# EAGLE board ARRAY_Nano-CC-EL_0v6.2_ENP252-17 (EAGLE 7.3.0), part 1 of 2
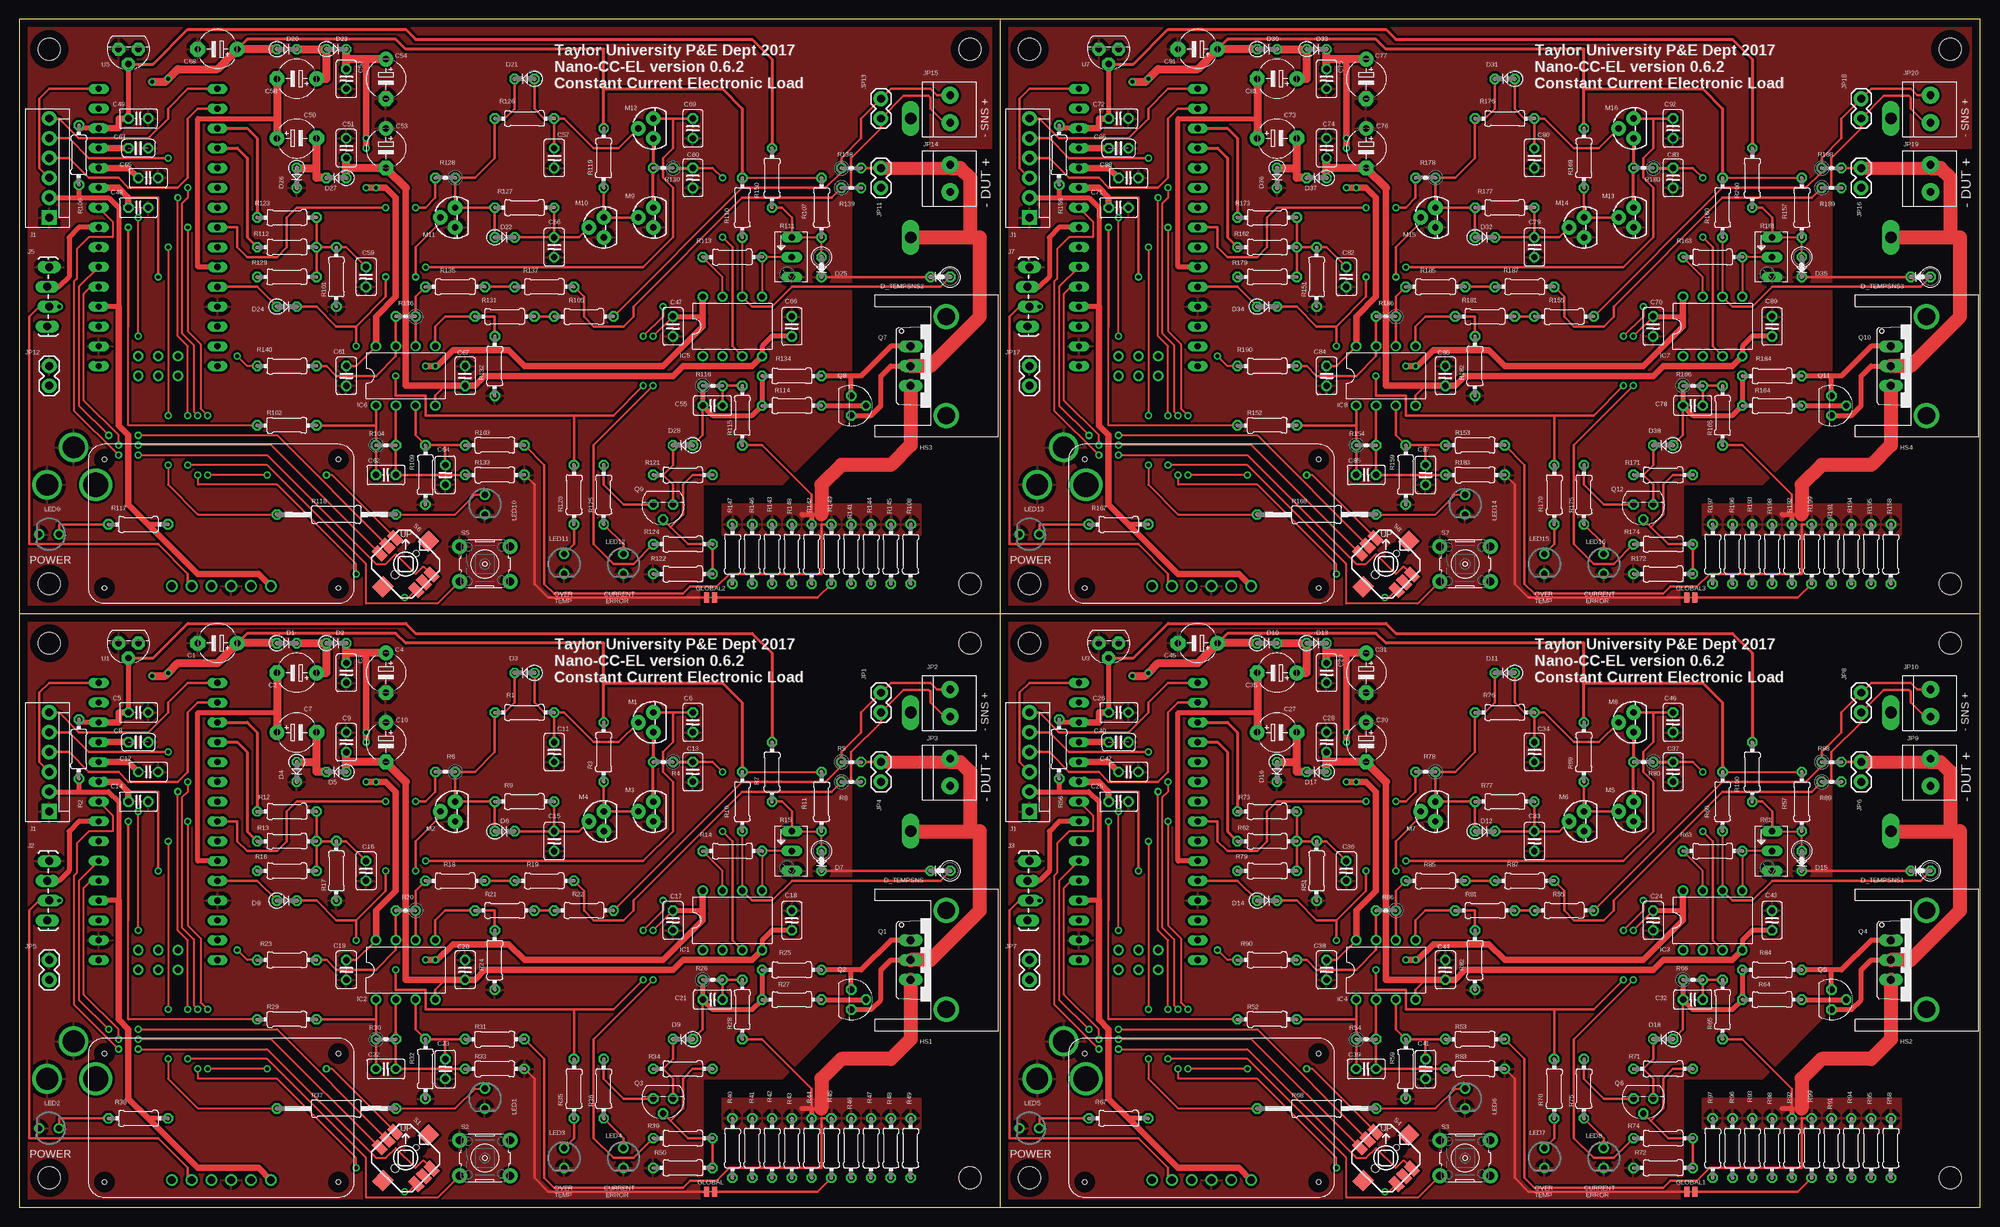
[diagram p0: board, top side]
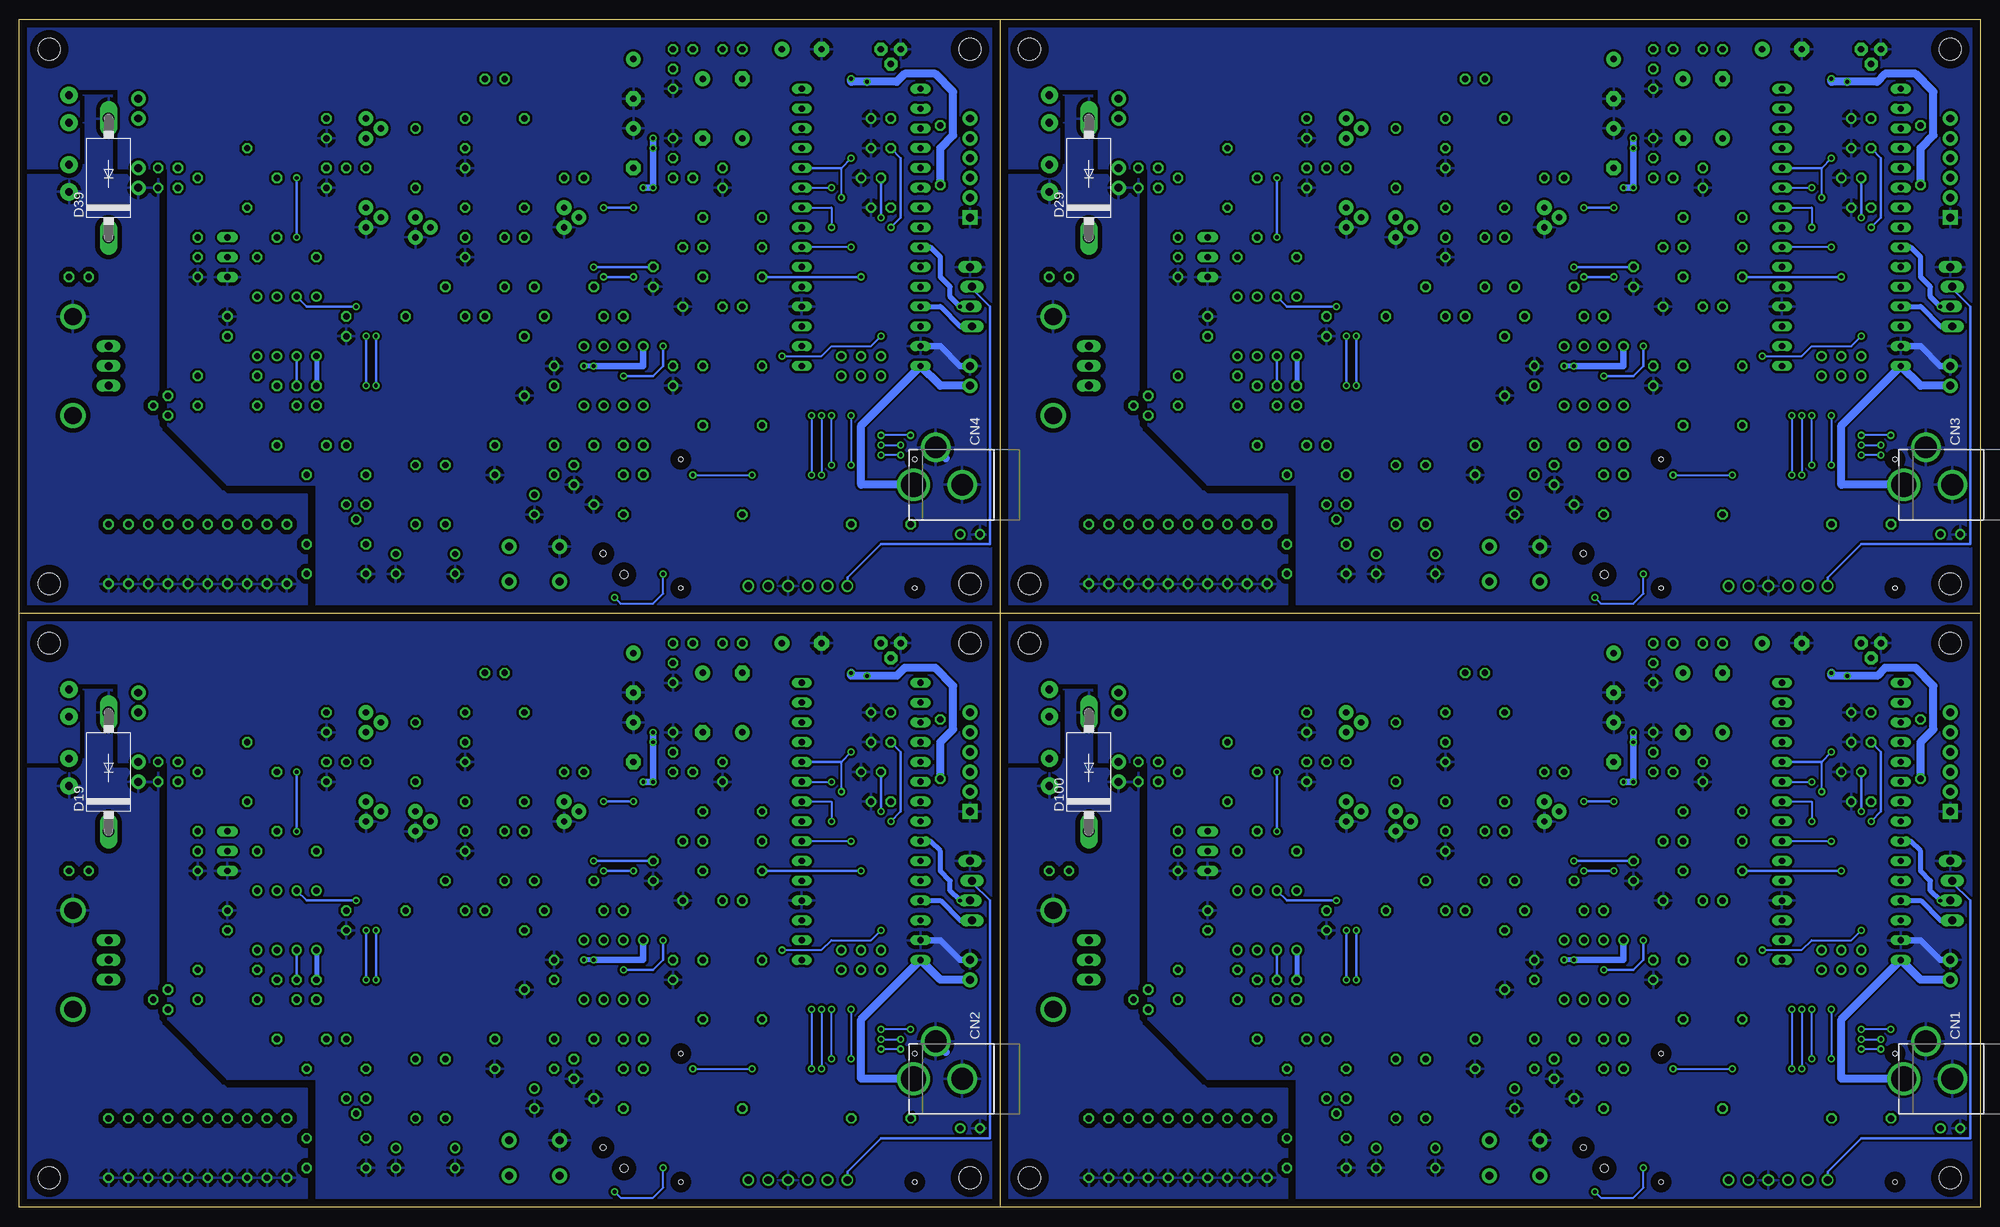
[diagram p1: board, bottom side, seen from below]

Size 251.46 x 152.4 mm. Coordinates in mm from the lower left corner, seen from the top.
Outline: 125.73,0 0,0 0,76.2
Outline: 125.73,0 251.46,0 251.46,76.2
Outline: 125.73,76.2 125.73,0
Outline: 0,76.2 125.73,76.2
Outline: 125.73,152.4 0,152.4 0,76.2
Outline: 125.73,76.2 251.46,76.2
Outline: 251.46,76.2 251.46,152.4 125.73,152.4
Outline: 125.73,152.4 125.73,76.2
Copper layers (1*16): Top 0.035mm / dielectric 1.5mm / Bottom 0.035mm
Design rules "4pcb_$33": minimum track width 6mil, minimum drill 15mil, track to track 6mil, track to pad 6mil, pad to pad 6mil, via to via 6mil, smd to smd 6mil, copper to edge 40mil, drill to drill 6mil, minimum pad ring 10mil, minimum via ring 8mil, stop-mask expansion 4mil, vias tented up to drill 0mil, thermal gap 20mil
Holes 2.79 mm at 3.81,3.81 3.81,72.39 121.92,3.81 121.92,72.39 129.54,3.81 129.54,72.39 247.65,3.81 247.65,72.39 3.81,80.01 3.81,148.59 121.92,80.01 121.92,148.59 129.54,80.01 129.54,148.59 247.65,80.01 247.65,148.59

## Footprints (pad centres in the part's own frame; a part is rotated, then mirrored left to right if it is on the bottom)
E5-5 = drill 0.813 pad 1.905: + -2.54,0 | drill 0.813 pad 1.905 octagon: - 2.54,0
C025-025X050 = drill 0.813 octagon: 1 -1.27,0; 2 1.27,0
C025-024X044 = drill 0.813 octagon: 1 -1.27,0; 2 1.27,0
DCJACK_2MM_PTH = drill 2.8: GND 0,7.35; GNDBREAK 4.8,10.75 | drill 3.2: PWR 0,13.6
0207/2V-D = drill 0.813 octagon: A -1.27,0; K 1.27,0
DO201-15 = drill 1.499 long: A 7.62,0; C -7.62,0
PAD-JUMPER-2-NC_BY_TRACE_NO_SILK = smd 0.635 x 1.27: 1 -0.508,0; 2 0.508,0
WX-T220-101E = drill 2.2 pad 3.175: K1 -6.35,-4.572; K2 6.35,-4.572
DIL08 = drill 0.813 pad 1.27: 1 -3.81,-3.81; 2 -1.27,-3.81; 3 1.27,-3.81; 4 3.81,-3.81; 5 3.81,3.81; 6 1.27,3.81; 7 -1.27,3.81; 8 -3.81,3.81
MOLEX-1X6 = drill 1.016 pad 1.88 square: 1 0,0 | drill 1.016 pad 1.88: 2 2.54,0; 3 5.08,0; 4 7.62,0; 5 10.16,0; 6 12.7,0
1X04_LOCK_LONGPADS = drill 1.016 long: 1 0,0; 2 2.54,-0.254; 3 5.08,0; 4 7.62,-0.254
1X02 = drill 1.016 pad 1.88: 1 0,0; 2 2.54,0
1X2-3.5MM = drill 1 pad 2.184: 1 1.8,0; 2 -1.7,0
LED3MM-NS = drill 0.813: A -1.27,0; K 1.27,0
TO-92 = drill 0.813 pad 1.88: 1 -1.27,0; 2 0,1.905; 3 1.27,0
TO220AV = drill 1.016 long: B -2.54,-2.54; C 0,-2.54; E 2.54,-2.54
TO92 = drill 0.813 octagon: 1 1.27,0; 2 0,1.905; 3 -1.27,0
0204/7 = drill 0.813 octagon: 1 -3.81,0; 2 3.81,0
0204V = drill 0.813 octagon: 1 -1.27,0; 2 1.27,0
B64Y = drill 0.813 long: A 2.54,0; E -2.54,0; S 0,0
0207/15 = drill 0.813 octagon: 1 -7.62,0; 2 7.62,0
JOYSTICK_MINI = smd 1.85 x 1.1: A -3.325,1.4; B 3.325,1.4; C -3.325,-1.4; CTR -3.325,0; D 3.325,-1.4; GND 3.325,0 | smd 1.9 x 2: NC 0,4.13; NC@0 0,-4.13 | hole 0.75: 0,1.9 | hole 1.05: 0,-1.9
OMRON_B3F-1XX-JPGMOD = drill 1.016 pad 1.93: 1 -3.251,-2.261; 2 3.251,-2.261; 3 -3.251,2.261; 4 3.251,2.261
TO92' = drill 0.813 pad 1.676 octagon: 1 -1.27,0; 2 0,1.905; 3 1.27,0
ADAFRUIT_128X32_I2C_OLED = drill 1: 3.3V 20.81,2.254; GND 18.27,2.254; RST 15.73,2.254; SCL 13.19,2.254; SDA 10.65,2.254; VIN 23.35,2.254 | hole 0.6: 2,2; 2,18.5; 32,18.5; 32,2
NANO = drill 0.8 long: 3.3V -10.16,24.13; 5V -10.16,-1.27; A0 -10.16,19.05; A1 -10.16,16.51; A2 -10.16,13.97; A3 -10.16,11.43; A4 -10.16,8.89; A5 -10.16,6.35; A6 -10.16,3.81; A7 -10.16,1.27; AREF -10.16,21.59; D2 5.08,1.27; D3 5.08,3.81; D4 5.08,6.35; D5 5.08,8.89; D6 5.08,11.43; D7 5.08,13.97; D8 5.08,16.51; D9 5.08,19.05; D10 5.08,21.59; D11 5.08,24.13; D12 5.08,26.67; D13 -10.16,26.67; GND -10.16,-6.35; GND1 5.08,-1.27; RAW -10.16,-8.89; RST -10.16,-3.81; RST1 5.08,-3.81; RX1 5.08,-6.35; TX0 5.08,-8.89 | drill 0.8: ICSP1 -5.08,-10.16; ICSP2 -5.08,-7.62; ICSP3 -2.54,-10.16; ICSP4 -2.54,-7.62; ICSP5 0,-10.16; ICSP6 0,-7.62

## Placement (x,y rotation side)
C1  10uF  [E5-5]  25.4,72.39 180 top
C2  10uF  [E5-5]  35.56,68.58 180 top
C3  0.1uF  [C025-025X050]  41.91,68.58 270 top
C4  10uF  [E5-5]  46.99,68.58 270 top
C5  0.1u  [C025-025X050]  15.24,63.5 0 top
C6  0.1uF  [C025-025X050]  86.36,62.23 270 top
C7  10uF  [E5-5]  35.56,60.96 0 top
C8  100nF  [C025-024X044]  15.24,59.69 0 top
C9  0.1uF  [C025-025X050]  41.91,59.69 270 top
C10  10uF  [E5-5]  46.99,59.69 270 top
C11  1nF  [C025-025X050]  68.58,58.42 270 top
C12  0.1uF  [C025-025X050]  16.51,55.88 0 top
C13  TBD  [C025-025X050]  86.36,55.88 270 top
C14  TBD  [C025-025X050]  15.24,52.07 0 top
C15  1nF  [C025-025X050]  68.58,46.99 270 top
C16  TBD  [C025-025X050]  44.45,43.18 270 top
C17  0.1uF  [C025-025X050]  83.82,36.83 270 top
C18  0.1uF  [C025-025X050]  99.06,36.83 270 top
C19  0.1uF  [C025-025X050]  41.91,30.48 270 top
C20  0.1uF  [C025-025X050]  57.15,30.48 270 top
C21  TBD  [C025-025X050]  88.9,26.67 180 top
C22  0.1uF  [C025-025X050]  46.99,17.78 0 top
C23  0.1uF  [C025-025X050]  54.61,17.78 90 top
C24  0.1uF  [C025-025X050]  209.55,36.83 270 top
C25  TBD  [C025-025X050]  140.97,52.07 0 top
C26  0.1u  [C025-025X050]  140.97,63.5 0 top
C27  10uF  [E5-5]  161.29,60.96 0 top
C28  0.1uF  [C025-025X050]  167.64,59.69 270 top
C29  0.1uF  [C025-025X050]  167.64,68.58 270 top
C30  10uF  [E5-5]  172.72,59.69 270 top
C31  10uF  [E5-5]  172.72,68.58 270 top
C32  TBD  [C025-025X050]  214.63,26.67 180 top
C33  1nF  [C025-025X050]  194.31,46.99 270 top
C34  1nF  [C025-025X050]  194.31,58.42 270 top
C35  10uF  [E5-5]  161.29,68.58 180 top
C36  TBD  [C025-025X050]  170.18,43.18 270 top
C37  TBD  [C025-025X050]  212.09,55.88 270 top
C38  0.1uF  [C025-025X050]  167.64,30.48 270 top
C39  0.1uF  [C025-025X050]  172.72,17.78 0 top
C40  100nF  [C025-024X044]  140.97,59.69 0 top
C41  0.1uF  [C025-025X050]  180.34,17.78 90 top
C42  0.1uF  [C025-025X050]  142.24,55.88 0 top
C43  0.1uF  [C025-025X050]  224.79,36.83 270 top
C44  0.1uF  [C025-025X050]  182.88,30.48 270 top
C45  10uF  [E5-5]  151.13,72.39 180 top
C46  0.1uF  [C025-025X050]  212.09,62.23 270 top
C47  0.1uF  [C025-025X050]  83.82,113.03 270 top
C48  TBD  [C025-025X050]  15.24,128.27 0 top
C49  0.1u  [C025-025X050]  15.24,139.7 0 top
C50  10uF  [E5-5]  35.56,137.16 0 top
C51  0.1uF  [C025-025X050]  41.91,135.89 270 top
C52  0.1uF  [C025-025X050]  41.91,144.78 270 top
C53  10uF  [E5-5]  46.99,135.89 270 top
C54  10uF  [E5-5]  46.99,144.78 270 top
C55  TBD  [C025-025X050]  88.9,102.87 180 top
C56  1nF  [C025-025X050]  68.58,123.19 270 top
C57  1nF  [C025-025X050]  68.58,134.62 270 top
C58  10uF  [E5-5]  35.56,144.78 180 top
C59  TBD  [C025-025X050]  44.45,119.38 270 top
C60  TBD  [C025-025X050]  86.36,132.08 270 top
C61  0.1uF  [C025-025X050]  41.91,106.68 270 top
C62  0.1uF  [C025-025X050]  46.99,93.98 0 top
C63  100nF  [C025-024X044]  15.24,135.89 0 top
C64  0.1uF  [C025-025X050]  54.61,93.98 90 top
C65  0.1uF  [C025-025X050]  16.51,132.08 0 top
C66  0.1uF  [C025-025X050]  99.06,113.03 270 top
C67  0.1uF  [C025-025X050]  57.15,106.68 270 top
C68  10uF  [E5-5]  25.4,148.59 180 top
C69  0.1uF  [C025-025X050]  86.36,138.43 270 top
C70  0.1uF  [C025-025X050]  209.55,113.03 270 top
C71  TBD  [C025-025X050]  140.97,128.27 0 top
C72  0.1u  [C025-025X050]  140.97,139.7 0 top
C73  10uF  [E5-5]  161.29,137.16 0 top
C74  0.1uF  [C025-025X050]  167.64,135.89 270 top
C75  0.1uF  [C025-025X050]  167.64,144.78 270 top
C76  10uF  [E5-5]  172.72,135.89 270 top
C77  10uF  [E5-5]  172.72,144.78 270 top
C78  TBD  [C025-025X050]  214.63,102.87 180 top
C79  1nF  [C025-025X050]  194.31,123.19 270 top
C80  1nF  [C025-025X050]  194.31,134.62 270 top
C81  10uF  [E5-5]  161.29,144.78 180 top
C82  TBD  [C025-025X050]  170.18,119.38 270 top
C83  TBD  [C025-025X050]  212.09,132.08 270 top
C84  0.1uF  [C025-025X050]  167.64,106.68 270 top
C85  0.1uF  [C025-025X050]  172.72,93.98 0 top
C86  100nF  [C025-024X044]  140.97,135.89 0 top
C87  0.1uF  [C025-025X050]  180.34,93.98 90 top
C88  0.1uF  [C025-025X050]  142.24,132.08 0 top
C89  0.1uF  [C025-025X050]  224.79,113.03 270 top
C90  0.1uF  [C025-025X050]  182.88,106.68 270 top
C91  10uF  [E5-5]  151.13,148.59 180 top
C92  0.1uF  [C025-025X050]  212.09,138.43 270 top
CN1  [DCJACK_2MM_PTH]  -3.81,16.51 90 bottom
CN2  [DCJACK_2MM_PTH]  123.19,16.51 90 bottom
CN3  [DCJACK_2MM_PTH]  -3.81,92.71 90 bottom
CN4  [DCJACK_2MM_PTH]  123.19,92.71 90 bottom
D1  1N4148  [0207/2V-D]  34.29,72.39 0 top
D2  1N4148  [0207/2V-D]  40.64,72.39 0 top
D3  1N4148  [0207/2V-D]  64.77,68.58 180 top
D4  1N4148  [0207/2V-D]  35.56,55.88 270 top
D5  1N4148  [0207/2V-D]  40.64,55.88 180 top
D6  1N4148  [0207/2V-D]  62.23,48.26 0 top
D7  1N4148  [0207/2V-D]  102.87,44.45 270 top
D8  1N4148  [0207/2V-D]  34.29,39.37 0 top
D9  1N4148  [0207/2V-D]  85.09,21.59 180 top
D10  1N4148  [0207/2V-D]  160.02,72.39 0 top
D11  1N4148  [0207/2V-D]  190.5,68.58 180 top
D12  1N4148  [0207/2V-D]  187.96,48.26 0 top
D13  1N4148  [0207/2V-D]  166.37,72.39 0 top
D14  1N4148  [0207/2V-D]  160.02,39.37 0 top
D15  1N4148  [0207/2V-D]  228.6,44.45 270 top
D16  1N4148  [0207/2V-D]  161.29,55.88 270 top
D17  1N4148  [0207/2V-D]  166.37,55.88 180 top
D18  1N4148  [0207/2V-D]  210.82,21.59 180 top
D19  1N5400  [DO201-15]  240.03,55.88 90 bottom
D20  1N4148  [0207/2V-D]  34.29,148.59 0 top
D21  1N4148  [0207/2V-D]  64.77,144.78 180 top
D22  1N4148  [0207/2V-D]  62.23,124.46 0 top
D23  1N4148  [0207/2V-D]  40.64,148.59 0 top
D24  1N4148  [0207/2V-D]  34.29,115.57 0 top
D25  1N4148  [0207/2V-D]  102.87,120.65 270 top
D26  1N4148  [0207/2V-D]  35.56,132.08 270 top
D27  1N4148  [0207/2V-D]  40.64,132.08 180 top
D28  1N4148  [0207/2V-D]  85.09,97.79 180 top
D29  1N5400  [DO201-15]  114.3,132.08 90 bottom
D30  1N4148  [0207/2V-D]  160.02,148.59 0 top
D31  1N4148  [0207/2V-D]  190.5,144.78 180 top
D32  1N4148  [0207/2V-D]  187.96,124.46 0 top
D33  1N4148  [0207/2V-D]  166.37,148.59 0 top
D34  1N4148  [0207/2V-D]  160.02,115.57 0 top
D35  1N4148  [0207/2V-D]  228.6,120.65 270 top
D36  1N4148  [0207/2V-D]  161.29,132.08 270 top
D37  1N4148  [0207/2V-D]  166.37,132.08 180 top
D38  1N4148  [0207/2V-D]  210.82,97.79 180 top
D39  1N5400  [DO201-15]  240.03,132.08 90 bottom
D100  1N5400  [DO201-15]  114.3,55.88 90 bottom
D_TEMPSNS  1N4148  [0207/2V-D]  118.11,43.18 180 top
D_TEMPSNS1  1N4148  [0207/2V-D]  243.84,43.18 180 top
D_TEMPSNS2  1N4148  [0207/2V-D]  118.11,119.38 180 top
D_TEMPSNS3  1N4148  [0207/2V-D]  243.84,119.38 180 top
GLOBAL  [PAD-JUMPER-2-NC_BY_TRACE_NO_SILK]  88.65,2.03 0 top
GLOBAL1  [PAD-JUMPER-2-NC_BY_TRACE_NO_SILK]  214.38,2.03 0 top
GLOBAL2  [PAD-JUMPER-2-NC_BY_TRACE_NO_SILK]  88.65,78.23 0 top
GLOBAL3  [PAD-JUMPER-2-NC_BY_TRACE_NO_SILK]  214.38,78.23 0 top
HS1  WA-T220-101E  [WX-T220-101E]  114.3,31.75 90 top
HS2  WA-T220-101E  [WX-T220-101E]  240.03,31.75 90 top
HS3  WA-T220-101E  [WX-T220-101E]  114.3,107.95 90 top
HS4  WA-T220-101E  [WX-T220-101E]  240.03,107.95 90 top
IC1  LM358N  [DIL08]  91.44,36.83 0 top
IC2  LM358N  [DIL08]  49.53,30.48 0 top
IC3  LM358N  [DIL08]  217.17,36.83 0 top
IC4  LM358N  [DIL08]  175.26,30.48 0 top
IC5  LM358N  [DIL08]  91.44,113.03 0 top
IC6  LM358N  [DIL08]  49.53,106.68 0 top
IC7  LM358N  [DIL08]  217.17,113.03 0 top
IC8  LM358N  [DIL08]  175.26,106.68 0 top
J1  [MOLEX-1X6]  3.81,50.8 90 top
J2  [1X04_LOCK_LONGPADS]  3.81,44.45 270 top
J3  [1X04_LOCK_LONGPADS]  129.54,44.45 270 top
J4  [MOLEX-1X6]  129.54,50.8 90 top
J5  [1X04_LOCK_LONGPADS]  3.81,120.65 270 top
J6  [MOLEX-1X6]  3.81,127 90 top
J7  [1X04_LOCK_LONGPADS]  129.54,120.65 270 top
J8  [MOLEX-1X6]  129.54,127 90 top
JP1  [1X02]  110.49,66.04 270 top
JP2  1X2-3.5MM  [1X2-3.5MM]  119.38,64.77 270 top
JP3  1X2-3.5MM  [1X2-3.5MM]  119.38,55.88 270 top
JP4  [1X02]  110.49,54.61 90 top
JP5  [1X02]  3.81,31.75 270 top
JP6  [1X02]  236.22,54.61 90 top
JP7  [1X02]  129.54,31.75 270 top
JP8  [1X02]  236.22,66.04 270 top
JP9  1X2-3.5MM  [1X2-3.5MM]  245.11,55.88 270 top
JP10  1X2-3.5MM  [1X2-3.5MM]  245.11,64.77 270 top
JP11  [1X02]  110.49,130.81 90 top
JP12  [1X02]  3.81,107.95 270 top
JP13  [1X02]  110.49,142.24 270 top
JP14  1X2-3.5MM  [1X2-3.5MM]  119.38,132.08 270 top
JP15  1X2-3.5MM  [1X2-3.5MM]  119.38,140.97 270 top
JP16  [1X02]  236.22,130.81 90 top
JP17  [1X02]  129.54,107.95 270 top
JP18  [1X02]  236.22,142.24 270 top
JP19  1X2-3.5MM  [1X2-3.5MM]  245.11,132.08 270 top
JP20  1X2-3.5MM  [1X2-3.5MM]  245.11,140.97 270 top
LED1  [LED3MM-NS]  59.69,13.97 270 top
LED2  [LED3MM-NS]  3.81,10.16 180 top
LED3  [LED3MM-NS]  69.85,6.35 270 top
LED4  [LED3MM-NS]  77.47,6.35 270 top
LED5  [LED3MM-NS]  129.54,10.16 180 top
LED6  [LED3MM-NS]  185.42,13.97 270 top
LED7  [LED3MM-NS]  195.58,6.35 270 top
LED8  [LED3MM-NS]  203.2,6.35 270 top
LED9  [LED3MM-NS]  3.81,86.36 180 top
LED10  [LED3MM-NS]  59.69,90.17 270 top
LED11  [LED3MM-NS]  69.85,82.55 270 top
LED12  [LED3MM-NS]  77.47,82.55 270 top
LED13  [LED3MM-NS]  129.54,86.36 180 top
LED14  [LED3MM-NS]  185.42,90.17 270 top
LED15  [LED3MM-NS]  195.58,82.55 270 top
LED16  [LED3MM-NS]  203.2,82.55 270 top
M1  2N7000  [TO-92]  81.28,62.23 90 top
M2  2N7000  [TO-92]  55.88,50.8 90 top
M3  2N7000  [TO-92]  81.28,50.8 90 top
M4  2N7000  [TO-92]  74.93,49.53 90 top
M5  2N7000  [TO-92]  207.01,50.8 90 top
M6  2N7000  [TO-92]  200.66,49.53 90 top
M7  2N7000  [TO-92]  181.61,50.8 90 top
M8  2N7000  [TO-92]  207.01,62.23 90 top
M9  2N7000  [TO-92]  81.28,127 90 top
M10  2N7000  [TO-92]  74.93,125.73 90 top
M11  2N7000  [TO-92]  55.88,127 90 top
M12  2N7000  [TO-92]  81.28,138.43 90 top
M13  2N7000  [TO-92]  207.01,127 90 top
M14  2N7000  [TO-92]  200.66,125.73 90 top
M15  2N7000  [TO-92]  181.61,127 90 top
M16  2N7000  [TO-92]  207.01,138.43 90 top
Q1  MJE3055  [TO220AV]  116.84,31.75 270 top
Q2  2N3904  [TO92]  106.68,26.67 270 top
Q3  2N3906  [TO92]  82.55,13.97 180 top
Q4  MJE3055  [TO220AV]  242.57,31.75 270 top
Q5  2N3904  [TO92]  232.41,26.67 270 top
Q6  2N3906  [TO92]  208.28,13.97 180 top
Q7  MJE3055  [TO220AV]  116.84,107.95 270 top
Q8  2N3904  [TO92]  106.68,102.87 270 top
Q9  2N3906  [TO92]  82.55,90.17 180 top
Q10  MJE3055  [TO220AV]  242.57,107.95 270 top
Q11  2N3904  [TO92]  232.41,102.87 270 top
Q12  2N3906  [TO92]  208.28,90.17 180 top
R1  10k  [0204/7]  64.77,63.5 180 top
R2  20k  [0204/7]  7.62,58.8 90 top
R3  10k  [0204/7]  74.93,58.42 90 top
R4  TBD  [0204V]  82.55,57.15 180 top
R5  10  [0204V]  106.68,57.15 0 top
R6  1k  [0204V]  54.61,55.88 180 top
R7  10k  [0204/7]  96.52,55.88 270 top
R8  10  [0204V]  106.68,54.61 0 top
R9  10k  [0204/7]  64.77,52.07 180 top
R10  10k  [0204/7]  92.71,52.07 270 top
R11  10k  [0204/7]  102.87,52.07 270 top
R12  TBD  [0204/7]  34.29,50.8 180 top
R13  TBD  [0204/7]  34.29,46.99 180 top
R14  TBD  [0204/7]  91.44,45.72 180 top
R15  10-50k  [B64Y]  99.06,45.72 270 top
R16  TBD  [0204/7]  34.29,43.18 180 top
R17  TBD  [0204/7]  40.64,43.18 90 top
R18  100k  [0204/7]  55.88,41.91 180 top
R19  100k  [0204/7]  67.31,41.91 180 top
R20  49.9k  [0204V]  49.53,38.1 180 top
R21  100k  [0204/7]  62.23,38.1 180 top
R22  100k  [0204/7]  72.39,38.1 180 top
R23  10k  [0204/7]  34.29,31.75 180 top
R24  49.9k  [0204/7]  60.96,31.75 270 top
R25  1k  [0204/7]  99.06,30.48 180 top
R26  TBD  [0204V]  88.9,29.21 0 top
R27  1k  [0204/7]  99.06,26.67 180 top
R28  TBD  [0204/7]  92.71,25.4 90 top
R29  10k  [0204/7]  34.29,24.13 0 top
R30  10.0k  [0204V]  46.99,21.59 0 top
R31  1.0k  [0204/7]  60.96,21.59 0 top
R32  10.0k  [0204/7]  52.07,17.78 90 top
R33  1.0k  [0204/7]  60.96,17.78 0 top
R34  10.0k  [0204/7]  85.09,17.78 180 top
R35  680  [0204/7]  71.12,15.24 270 top
R36  680  [0204/7]  74.93,15.24 270 top
R37  680  [0207/15]  40.64,12.7 0 top
R38  680  [0204/7]  15.24,11.43 180 top
R39  20.0k  [0204/7]  85.09,8.89 180 top
R40  100m  [0204/7]  91.44,7.62 270 top
R41  100m  [0204/7]  93.98,7.62 270 top
R42  100m  [0204/7]  96.52,7.62 270 top
R43  100m  [0204/7]  99.06,7.62 270 top
R44  100m  [0204/7]  101.6,7.62 270 top
R45  100m  [0204/7]  104.14,7.62 270 top
R46  100m  [0204/7]  106.68,7.62 270 top
R47  100m  [0204/7]  109.22,7.62 270 top
R48  100m  [0204/7]  111.76,7.62 270 top
R49  100m  [0204/7]  114.3,7.62 270 top
R50  10.0k  [0204/7]  85.09,5.08 180 top
R51  TBD  [0204/7]  166.37,43.18 90 top
R52  10k  [0204/7]  160.02,24.13 0 top
R53  1.0k  [0204/7]  186.69,21.59 0 top
R54  10.0k  [0204V]  172.72,21.59 0 top
R55  100k  [0204/7]  198.12,38.1 180 top
R56  20k  [0204/7]  133.35,58.8 90 top
R57  10k  [0204/7]  228.6,52.07 270 top
R58  100m  [0204/7]  240.03,7.62 270 top
R59  10.0k  [0204/7]  177.8,17.78 90 top
R60  10k  [0204/7]  218.44,52.07 270 top
R61  10-50k  [B64Y]  224.79,45.72 270 top
R62  TBD  [0204/7]  160.02,46.99 180 top
R63  TBD  [0204/7]  217.17,45.72 180 top
R64  1k  [0204/7]  224.79,26.67 180 top
R65  TBD  [0204/7]  218.44,25.4 90 top
R66  TBD  [0204V]  214.63,29.21 0 top
R67  680  [0204/7]  140.97,11.43 180 top
R68  680  [0207/15]  166.37,12.7 0 top
R69  10k  [0204/7]  200.66,58.42 90 top
R70  680  [0204/7]  196.85,15.24 270 top
R71  10.0k  [0204/7]  210.82,17.78 180 top
R72  10.0k  [0204/7]  210.82,5.08 180 top
R73  TBD  [0204/7]  160.02,50.8 180 top
R74  20.0k  [0204/7]  210.82,8.89 180 top
R75  680  [0204/7]  200.66,15.24 270 top
R76  10k  [0204/7]  190.5,63.5 180 top
R77  10k  [0204/7]  190.5,52.07 180 top
R78  1k  [0204V]  180.34,55.88 180 top
R79  TBD  [0204/7]  160.02,43.18 180 top
R80  TBD  [0204V]  208.28,57.15 180 top
R81  100k  [0204/7]  187.96,38.1 180 top
R82  49.9k  [0204/7]  186.69,31.75 270 top
R83  1.0k  [0204/7]  186.69,17.78 0 top
R84  1k  [0204/7]  224.79,30.48 180 top
R85  100k  [0204/7]  181.61,41.91 180 top
R86  49.9k  [0204V]  175.26,38.1 180 top
R87  100k  [0204/7]  193.04,41.91 180 top
R88  10  [0204V]  232.41,57.15 0 top
R89  10  [0204V]  232.41,54.61 0 top
R90  10k  [0204/7]  160.02,31.75 180 top
R91  100m  [0204/7]  232.41,7.62 270 top
R92  100m  [0204/7]  227.33,7.62 270 top
R93  100m  [0204/7]  222.25,7.62 270 top
R94  100m  [0204/7]  234.95,7.62 270 top
R95  100m  [0204/7]  237.49,7.62 270 top
R96  100m  [0204/7]  219.71,7.62 270 top
R97  100m  [0204/7]  217.17,7.62 270 top
R98  100m  [0204/7]  224.79,7.62 270 top
R99  100m  [0204/7]  229.87,7.62 270 top
R100  10k  [0204/7]  222.25,55.88 270 top
R101  TBD  [0204/7]  40.64,119.38 90 top
R102  10k  [0204/7]  34.29,100.33 0 top
R103  1.0k  [0204/7]  60.96,97.79 0 top
R104  10.0k  [0204V]  46.99,97.79 0 top
R105  100k  [0204/7]  72.39,114.3 180 top
R106  20k  [0204/7]  7.62,135 90 top
R107  10k  [0204/7]  102.87,128.27 270 top
R108  100m  [0204/7]  114.3,83.82 270 top
R109  10.0k  [0204/7]  52.07,93.98 90 top
R110  10k  [0204/7]  92.71,128.27 270 top
R111  10-50k  [B64Y]  99.06,121.92 270 top
R112  TBD  [0204/7]  34.29,123.19 180 top
R113  TBD  [0204/7]  91.44,121.92 180 top
R114  1k  [0204/7]  99.06,102.87 180 top
R115  TBD  [0204/7]  92.71,101.6 90 top
R116  TBD  [0204V]  88.9,105.41 0 top
R117  680  [0204/7]  15.24,87.63 180 top
R118  680  [0207/15]  40.64,88.9 0 top
R119  10k  [0204/7]  74.93,134.62 90 top
R120  680  [0204/7]  71.12,91.44 270 top
R121  10.0k  [0204/7]  85.09,93.98 180 top
R122  10.0k  [0204/7]  85.09,81.28 180 top
R123  TBD  [0204/7]  34.29,127 180 top
R124  20.0k  [0204/7]  85.09,85.09 180 top
R125  680  [0204/7]  74.93,91.44 270 top
R126  10k  [0204/7]  64.77,139.7 180 top
R127  10k  [0204/7]  64.77,128.27 180 top
R128  1k  [0204V]  54.61,132.08 180 top
R129  TBD  [0204/7]  34.29,119.38 180 top
R130  TBD  [0204V]  82.55,133.35 180 top
R131  100k  [0204/7]  62.23,114.3 180 top
R132  49.9k  [0204/7]  60.96,107.95 270 top
R133  1.0k  [0204/7]  60.96,93.98 0 top
R134  1k  [0204/7]  99.06,106.68 180 top
R135  100k  [0204/7]  55.88,118.11 180 top
R136  49.9k  [0204V]  49.53,114.3 180 top
R137  100k  [0204/7]  67.31,118.11 180 top
R138  10  [0204V]  106.68,133.35 0 top
R139  10  [0204V]  106.68,130.81 0 top
R140  10k  [0204/7]  34.29,107.95 180 top
R141  100m  [0204/7]  106.68,83.82 270 top
R142  100m  [0204/7]  101.6,83.82 270 top
R143  100m  [0204/7]  96.52,83.82 270 top
R144  100m  [0204/7]  109.22,83.82 270 top
R145  100m  [0204/7]  111.76,83.82 270 top
R146  100m  [0204/7]  93.98,83.82 270 top
R147  100m  [0204/7]  91.44,83.82 270 top
R148  100m  [0204/7]  99.06,83.82 270 top
R149  100m  [0204/7]  104.14,83.82 270 top
R150  10k  [0204/7]  96.52,132.08 270 top
R151  TBD  [0204/7]  166.37,119.38 90 top
R152  10k  [0204/7]  160.02,100.33 0 top
R153  1.0k  [0204/7]  186.69,97.79 0 top
R154  10.0k  [0204V]  172.72,97.79 0 top
R155  100k  [0204/7]  198.12,114.3 180 top
R156  20k  [0204/7]  133.35,135 90 top
R157  10k  [0204/7]  228.6,128.27 270 top
R158  100m  [0204/7]  240.03,83.82 270 top
R159  10.0k  [0204/7]  177.8,93.98 90 top
R160  10k  [0204/7]  218.44,128.27 270 top
R161  10-50k  [B64Y]  224.79,121.92 270 top
R162  TBD  [0204/7]  160.02,123.19 180 top
R163  TBD  [0204/7]  217.17,121.92 180 top
R164  1k  [0204/7]  224.79,102.87 180 top
R165  TBD  [0204/7]  218.44,101.6 90 top
R166  TBD  [0204V]  214.63,105.41 0 top
R167  680  [0204/7]  140.97,87.63 180 top
R168  680  [0207/15]  166.37,88.9 0 top
R169  10k  [0204/7]  200.66,134.62 90 top
R170  680  [0204/7]  196.85,91.44 270 top
R171  10.0k  [0204/7]  210.82,93.98 180 top
R172  10.0k  [0204/7]  210.82,81.28 180 top
R173  TBD  [0204/7]  160.02,127 180 top
R174  20.0k  [0204/7]  210.82,85.09 180 top
R175  680  [0204/7]  200.66,91.44 270 top
R176  10k  [0204/7]  190.5,139.7 180 top
R177  10k  [0204/7]  190.5,128.27 180 top
R178  1k  [0204V]  180.34,132.08 180 top
R179  TBD  [0204/7]  160.02,119.38 180 top
R180  TBD  [0204V]  208.28,133.35 180 top
R181  100k  [0204/7]  187.96,114.3 180 top
R182  49.9k  [0204/7]  186.69,107.95 270 top
R183  1.0k  [0204/7]  186.69,93.98 0 top
R184  1k  [0204/7]  224.79,106.68 180 top
R185  100k  [0204/7]  181.61,118.11 180 top
R186  49.9k  [0204V]  175.26,114.3 180 top
R187  100k  [0204/7]  193.04,118.11 180 top
R188  10  [0204V]  232.41,133.35 0 top
R189  10  [0204V]  232.41,130.81 0 top
R190  10k  [0204/7]  160.02,107.95 180 top
R191  100m  [0204/7]  232.41,83.82 270 top
R192  100m  [0204/7]  227.33,83.82 270 top
R193  100m  [0204/7]  222.25,83.82 270 top
R194  100m  [0204/7]  234.95,83.82 270 top
R195  100m  [0204/7]  237.49,83.82 270 top
R196  100m  [0204/7]  219.71,83.82 270 top
R197  100m  [0204/7]  217.17,83.82 270 top
R198  100m  [0204/7]  224.79,83.82 270 top
R199  100m  [0204/7]  229.87,83.82 270 top
R200  10k  [0204/7]  222.25,132.08 270 top
S1  [JOYSTICK_MINI]  49.53,6.35 315 top
S2  [OMRON_B3F-1XX-JPGMOD]  59.69,6.35 0 top
S3  [OMRON_B3F-1XX-JPGMOD]  185.42,6.35 0 top
S4  [JOYSTICK_MINI]  175.26,6.35 315 top
S5  [OMRON_B3F-1XX-JPGMOD]  59.69,82.55 0 top
S6  [JOYSTICK_MINI]  49.53,82.55 315 top
S7  [OMRON_B3F-1XX-JPGMOD]  185.42,82.55 0 top
S8  [JOYSTICK_MINI]  175.26,82.55 315 top
U1  LM4040 2.5V  [TO92']  13.97,72.39 180 top
U2  ADAFRUIT_128X32_I2C_OLED  [ADAFRUIT_128X32_I2C_OLED]  8.89,1.27 0 top
U3  LM4040 2.5V  [TO92']  139.7,72.39 180 top
U4  ADAFRUIT_128X32_I2C_OLED  [ADAFRUIT_128X32_I2C_OLED]  134.62,1.27 0 top
U5  LM4040 2.5V  [TO92']  13.97,148.59 180 top
U6  ADAFRUIT_128X32_I2C_OLED  [ADAFRUIT_128X32_I2C_OLED]  8.89,77.47 0 top
U7  LM4040 2.5V  [TO92']  139.7,148.59 180 top
U8  ADAFRUIT_128X32_I2C_OLED  [ADAFRUIT_128X32_I2C_OLED]  134.62,77.47 0 top
U$1  NANO  [NANO]  20.32,40.64 0 top
U$2  NANO  [NANO]  146.05,40.64 0 top
U$3  NANO  [NANO]  20.32,116.84 0 top
U$4  NANO  [NANO]  146.05,116.84 0 top

## Library data of the parts
C1-C92 R1-R14 R16-R60 R62-R110 R112-R160 R162-R200 = rcl
CN1-CN4 JP2 JP3 JP9 JP10 JP14 JP15 JP19 JP20 = adafruit
D1-D6 D8-D14 D16-D18 D20-D24 D26-D28 D30-D34 D36-D38 HS1-HS4 J1 J4 J6 J8 LED1-LED16 U2 U4 U6 U8 = JPG_17v2
D7 D15 D25 D35 D_TEMPSNS D_TEMPSNS1-D_TEMPSNS3 S2 S3 S5 S7 = ideal_elements
D19 D29 D39 D100 = diode
GLOBAL GLOBAL1-GLOBAL3 = SparkFun-Passives
IC1-IC8 = linear
J2 J3 J5 J7 = JPG_17v2; PROD_ID: CONN-09696
JP1 JP4-JP8 JP11-JP13 JP16-JP18 R15 R61 R111 R161 U1 U3 U5 U7 = JPG_17v1
M1-M16 = SparkFun-DiscreteSemi
Q1 Q4 Q7 Q10 = transistor-power
Q2 Q5 Q8 Q11 = transistor
Q3 Q6 Q9 Q12 = transistor-pnp
S1 S4 S6 S8 = SparkFun-Electromechanical; PROD_ID: SWCH-09905
U$1-U$4 = Arduino-clone

## Nets
2.5VREF: C5.1 R2.2 R7.1 U1.2 U$1.AREF
2.5VREF1: C26.1 R56.2 R100.1 U3.2 U$2.AREF
2.5VREF2: C49.1 R106.2 R150.1 U5.2 U$3.AREF
2.5VREF3: C72.1 R156.2 R200.1 U7.2 U$4.AREF
3.3V: U2.3.3V
3.3V1: U4.3.3V
3.3V2: U6.3.3V
3.3V3: U8.3.3V
+5V: C1.+ D1.A J1.2 J2.4 R2.1 R3.2 R10.1 R11.1 R38.1 U2.VIN U$1.5V
+5V1: C45.+ D10.A J3.4 J4.2 R56.1 R57.1 R60.1 R67.1 R69.2 U4.VIN U$2.5V
+5V2: C68.+ D20.A J5.4 J6.2 R106.1 R107.1 R110.1 R117.1 R119.2 U6.VIN U$3.5V
+5V3: C91.+ D30.A J7.4 J8.2 R156.1 R157.1 R160.1 R167.1 R169.2 U8.VIN U$4.5V
+9V: C3.1 C4.+ C17.1 C19.1 D2.K IC1.8 IC2.8 R39.2
+9V1: C24.1 C29.1 C31.+ C38.1 D13.K IC3.8 IC4.8 R74.2
+9V2: C47.1 C52.1 C54.+ C61.1 D23.K IC5.8 IC6.8 R124.2
+9V3: C70.1 C75.1 C77.+ C84.1 D33.K IC7.8 IC8.8 R174.2
-4V: C9.2 C10.- C18.2 C20.2 D5.A IC1.4 IC2.4
-4V1: C28.2 C30.- C43.2 C44.2 D17.A IC3.4 IC4.4
-4V2: C51.2 C53.- C66.2 C67.2 D27.A IC5.4 IC6.4
-4V3: C74.2 C76.- C89.2 C90.2 D37.A IC7.4 IC8.4
A1: S4.B U$2.A3
A2: S4.CTR U$2.A6
A3: S1.B U$1.A3
A4: S4.C U$2.A7
A5: S6.B U$3.A3
A6: S1.CTR U$1.A6
A7: S1.C U$1.A7
A8: S6.CTR U$3.A6
A9: S6.C U$3.A7
A10: S8.B U$4.A3
A11: S8.CTR U$4.A6
A12: S8.C U$4.A7
ADC_IDUT: C8.1 R29.1 U$1.A0
ADC_IDUT1: C40.1 R52.1 U$2.A0
ADC_IDUT2: C63.1 R102.1 U$3.A0
ADC_IDUT3: C86.1 R152.1 U$4.A0
ADC_V_IREF: C14.1 R16.2 U$1.A2
ADC_V_IREF1: C25.1 R79.2 U$2.A2
ADC_V_IREF2: C48.1 R129.2 U$3.A2
ADC_V_IREF3: C71.1 R179.2 U$4.A2
ADC_VDUT: C12.1 R23.2 U$1.A1
ADC_VDUT1: C42.1 R90.2 U$2.A1
ADC_VDUT2: C65.1 R140.2 U$3.A1
ADC_VDUT3: C88.1 R190.2 U$4.A1
AGND: D100.A GLOBAL.2 HS1.K2 JP3.1 JP4.1 R8.2 R40.2 R41.2 R42.2 R43.2 R44.2 R45.2 R46.2 R47.2 R48.2 R49.2
AGND1: D19.A GLOBAL1.2 HS2.K2 JP6.1 JP9.1 R58.2 R89.2 R91.2 R92.2 R93.2 R94.2 R95.2 R96.2 R97.2 R98.2 R99.2
AGND2: D29.A GLOBAL2.2 HS3.K2 JP11.1 JP14.1 R108.2 R139.2 R141.2 R142.2 R143.2 R144.2 R145.2 R146.2 R147.2 R148.2 R149.2
AGND3: D39.A GLOBAL3.2 HS4.K2 JP16.1 JP19.1 R158.2 R189.2 R191.2 R192.2 R193.2 R194.2 R195.2 R196.2 R197.2 R198.2 R199.2
D1: R68.1 U$2.D4
D2: S4.A U$2.D6
D3: J4.5 S3.1 U$2.D8
D4: R37.1 U$1.D4
D5: S4.D U$2.D7
D6: S1.A U$1.D6
D7: S1.D U$1.D7
D8: J1.5 S2.1 U$1.D8
D9: R118.1 U$3.D4
D10: S6.A U$3.D6
D11: J6.5 S5.1 U$3.D8
D12: S6.D U$3.D7
D13: R168.1 U$4.D4
D14: S8.A U$4.D6
D15: J8.5 S7.1 U$4.D8
D16: S8.D U$4.D7
DAC_LSB_PWM: R12.2 U$1.D10
DAC_LSB_PWM1: R73.2 U$2.D10
DAC_LSB_PWM2: R123.2 U$3.D10
DAC_LSB_PWM3: R173.2 U$4.D10
DAC_MSB_PWM: R13.2 U$1.D9
DAC_MSB_PWM1: R62.2 U$2.D9
DAC_MSB_PWM2: R112.2 U$3.D9
DAC_MSB_PWM3: R162.2 U$4.D9
EN_VIN_FET: R6.2 U$1.D5
EN_VIN_FET1: R78.2 U$2.D5
EN_VIN_FET2: R128.2 U$3.D5
EN_VIN_FET3: R178.2 U$4.D5
EN_VIN_FETX: D3.K D6.A M2.3 R1.2 R6.1 R9.2
EN_VIN_FETX1: D11.K D12.A M7.3 R76.2 R77.2 R78.1
EN_VIN_FETX2: D21.K D22.A M11.3 R126.2 R127.2 R128.1
EN_VIN_FETX3: D31.K D32.A M15.3 R176.2 R177.2 R178.1
GND: C1.- C3.2 C4.- C5.2 C6.2 C8.2 C9.1 C10.+ C11.2 C12.2 C13.2 C14.2 C15.2 C16.2 C17.2 C18.1 C19.2 C20.1 C23.1 CN1.GND CN1.GNDBREAK D4.K D7.K D_TEMPSNS.K GLOBAL.1 J1.1 J2.1 JP5.1 LED1.K LED2.K LED3.K LED4.K M2.1 M3.1 M4.1 R15.A R17.1 R24.2 R32.1 R33.2 R50.2 S1.GND S2.3 U1.3 U2.GND U$1.GND U$1.GND1
GND1: C24.2 C25.2 C26.2 C28.1 C29.2 C30.+ C31.- C33.2 C34.2 C36.2 C37.2 C38.2 C40.2 C41.1 C42.2 C43.1 C44.1 C45.- C46.2 CN2.GND CN2.GNDBREAK D15.K D16.K D_TEMPSNS1.K GLOBAL1.1 J3.1 J4.1 JP7.1 LED5.K LED6.K LED7.K LED8.K M5.1 M6.1 M7.1 R51.1 R59.1 R61.A R72.2 R82.2 R83.2 S3.3 S4.GND U3.3 U4.GND U$2.GND U$2.GND1
GND2: C47.2 C48.2 C49.2 C51.1 C52.2 C53.+ C54.- C56.2 C57.2 C59.2 C60.2 C61.2 C63.2 C64.1 C65.2 C66.1 C67.1 C68.- C69.2 CN3.GND CN3.GNDBREAK D25.K D26.K D_TEMPSNS2.K GLOBAL2.1 J5.1 J6.1 JP12.1 LED9.K LED10.K LED11.K LED12.K M9.1 M10.1 M11.1 R101.1 R109.1 R111.A R122.2 R132.2 R133.2 S5.3 S6.GND U5.3 U6.GND U$3.GND U$3.GND1
GND3: C70.2 C71.2 C72.2 C74.1 C75.2 C76.+ C77.- C79.2 C80.2 C82.2 C83.2 C84.2 C86.2 C87.1 C88.2 C89.1 C90.1 C91.- C92.2 CN4.GND CN4.GNDBREAK D35.K D36.K D_TEMPSNS3.K GLOBAL3.1 J7.1 J8.1 JP17.1 LED13.K LED14.K LED15.K LED16.K M13.1 M14.1 M15.1 R151.1 R159.1 R161.A R172.2 R182.2 R183.2 S7.3 S8.GND U7.3 U8.GND U$4.GND U$4.GND1
I_ERROR: Q3.1 R36.1
I_ERROR1: Q6.1 R75.1
I_ERROR2: Q9.1 R125.1
I_ERROR3: Q12.1 R175.1
MISO: J1.6 U$1.D12
MISO1: J4.6 U$2.D12
MISO2: J6.6 U$3.D12
MISO3: J8.6 U$4.D12
MOSI: J1.4 U$1.D11
MOSI1: J4.4 U$2.D11
MOSI2: J6.4 U$3.D11
MOSI3: J8.4 U$4.D11
N$1: D7.A R7.2 R11.2 R15.E
N$2: R21.1 R22.2
N$3: C23.2 IC2.3 R31.1 R32.2
N$4: C22.2 IC2.2 R30.2 R33.1
N$5: D_TEMPSNS.A IC1.6 R10.2
N$6: IC1.5 R14.1 R15.S
N$7: C35.+ D10.K D13.A
N$8: C11.1 D3.A M1.2 R1.1
N$9: D9.K Q3.3 R34.2
N$10: IC2.6 R18.2 R20.1
N$11: C7.- D4.A D5.K
N$12: LED3.A R35.2
N$13: LED2.A R38.2
N$14: LED1.A R37.2
N$15: C22.1 IC2.1 R29.2 R30.1
N$16: LED4.A R36.2
N$17: Q3.2 R34.1 R39.1 R50.1
N$18: C2.+ D1.K D2.A
N$19: IC2.5 R21.2 R24.1
N$20: C15.1 D6.K M4.2 R9.1
N$21: M3.2 M4.3 R3.1
N$22: JP1.1 JP2.2 R5.1 R22.1
N$23: D8.A U$1.D2
N$24: Q2.2 R27.1
N$25: D100.C JP3.2 JP4.2 Q1.C Q2.1 R5.2
N$26: Q1.B Q2.3 R25.1
N$27: R18.1 R19.2
N$28: C21.1 IC1.2 R26.2 R28.2
N$29: JP1.2 JP2.1 R8.1 R19.1
N$30: D19.C JP6.2 JP9.2 Q4.C Q5.1 R88.2
N$31: C27.- D16.A D17.K
N$32: C41.2 IC4.3 R53.1 R59.2
N$33: C39.2 IC4.2 R54.2 R83.1
N$34: C39.1 IC4.1 R52.2 R54.1
N$35: D15.A R57.2 R61.E R100.2
N$36: D_TEMPSNS1.A IC3.6 R60.2
N$37: IC3.5 R61.S R63.1
N$38: Q5.2 R64.1
N$39: Q4.B Q5.3 R84.1
N$40: C32.1 IC3.2 R65.2 R66.2
N$41: D14.A U$2.D2
N$42: LED5.A R67.2
N$43: LED6.A R68.2
N$44: R55.2 R81.1
N$45: LED7.A R70.2
N$46: D18.K Q6.3 R71.2
N$47: Q6.2 R71.1 R72.1 R74.1
N$48: LED8.A R75.2
N$49: C33.1 D12.K M6.2 R77.1
N$50: C34.1 D11.A M8.2 R76.1
N$51: M5.2 M6.3 R69.1
N$52: IC4.5 R81.2 R82.1
N$53: R85.1 R87.2
N$54: IC4.6 R85.2 R86.1
N$55: JP8.1 JP10.2 R55.1 R88.1
N$56: JP8.2 JP10.1 R87.1 R89.1
N$57: C58.+ D20.K D23.A
N$58: D29.C JP11.2 JP14.2 Q7.C Q8.1 R138.2
N$59: C50.- D26.A D27.K
N$60: C64.2 IC6.3 R103.1 R109.2
N$61: C62.2 IC6.2 R104.2 R133.1
N$62: C62.1 IC6.1 R102.2 R104.1
N$63: D25.A R107.2 R111.E R150.2
N$64: D_TEMPSNS2.A IC5.6 R110.2
N$65: IC5.5 R111.S R113.1
N$66: Q8.2 R114.1
N$67: Q7.B Q8.3 R134.1
N$68: C55.1 IC5.2 R115.2 R116.2
N$69: D24.A U$3.D2
N$70: LED9.A R117.2
N$71: LED10.A R118.2
N$72: R105.2 R131.1
N$73: LED11.A R120.2
N$74: D28.K Q9.3 R121.2
N$75: Q9.2 R121.1 R122.1 R124.1
N$76: LED12.A R125.2
N$77: C56.1 D22.K M10.2 R127.1
N$78: C57.1 D21.A M12.2 R126.1
N$79: M9.2 M10.3 R119.1
N$80: IC6.5 R131.2 R132.1
N$81: R135.1 R137.2
N$82: IC6.6 R135.2 R136.1
N$83: JP13.1 JP15.2 R105.1 R138.1
N$84: JP13.2 JP15.1 R137.1 R139.1
N$85: C81.+ D30.K D33.A
N$86: D39.C JP16.2 JP19.2 Q10.C Q11.1 R188.2
N$87: C73.- D36.A D37.K
N$88: C87.2 IC8.3 R153.1 R159.2
N$89: C85.2 IC8.2 R154.2 R183.1
N$90: C85.1 IC8.1 R152.2 R154.1
N$91: D35.A R157.2 R161.E R200.2
N$92: D_TEMPSNS3.A IC7.6 R160.2
N$93: IC7.5 R161.S R163.1
N$94: Q11.2 R164.1
N$95: Q10.B Q11.3 R184.1
N$96: C78.1 IC7.2 R165.2 R166.2
N$97: D34.A U$4.D2
N$98: LED13.A R167.2
N$99: LED14.A R168.2
N$100: R155.2 R181.1
N$101: LED15.A R170.2
N$102: D38.K Q12.3 R171.2
N$103: Q12.2 R171.1 R172.1 R174.1
N$104: LED16.A R175.2
N$105: C79.1 D32.K M14.2 R177.1
N$106: C80.1 D31.A M16.2 R176.1
N$107: M13.2 M14.3 R169.1
N$108: IC8.5 R181.2 R182.1
N$109: R185.1 R187.2
N$110: IC8.6 R185.2 R186.1
N$111: JP18.1 JP20.2 R155.1 R188.1
N$112: JP18.2 JP20.1 R187.1 R189.1
OT: D8.K IC1.7 M2.2 R14.2 R35.1
OT1: D14.K IC3.7 M7.2 R63.2 R70.1
OT2: D24.K IC5.7 M11.2 R113.2 R120.1
OT3: D34.K IC7.7 M15.2 R163.2 R170.1
PS_PWM: C2.- C7.+ U$1.D3
PS_PWM1: C27.+ C35.- U$2.D3
PS_PWM2: C50.+ C58.- U$3.D3
PS_PWM3: C73.+ C81.- U$4.D3
RAW: CN1.PWR JP5.2 U$1.RAW
RAW1: CN2.PWR JP7.2 U$2.RAW
RAW2: CN3.PWR JP12.2 U$3.RAW
RAW3: CN4.PWR JP17.2 U$4.RAW
SCK: J1.3 U$1.D13
SCK1: J4.3 U$2.D13
SCK2: J6.3 U$3.D13
SCK3: J8.3 U$4.D13
SCL: J2.3 U2.SCL U$1.A5
SCL1: J3.3 U4.SCL U$2.A5
SCL2: J5.3 U6.SCL U$3.A5
SCL3: J7.3 U8.SCL U$4.A5
SDA: J2.2 U2.SDA U$1.A4
SDA1: J3.2 U4.SDA U$2.A4
SDA2: J5.2 U6.SDA U$3.A4
SDA3: J7.2 U8.SDA U$4.A4
V_IREF: C6.1 C16.1 M1.3 R12.1 R13.1 R16.1 R17.2
V_IREF1: C36.1 C46.1 M8.3 R51.2 R62.1 R73.1 R79.1
V_IREF2: C59.1 C69.1 M12.3 R101.2 R112.1 R123.1 R129.1
V_IREF3: C82.1 C92.1 M16.3 R151.2 R162.1 R173.1 R179.1
V_IREF_SWD: M1.1 M3.3 R4.2
V_IREF_SWD1: M5.3 M8.1 R80.2
V_IREF_SWD2: M9.3 M12.1 R130.2
V_IREF_SWD3: M13.3 M16.1 R180.2
V_IREF_SWD_F: C13.1 IC1.3 R4.1
V_IREF_SWD_F1: C37.1 IC3.3 R80.1
V_IREF_SWD_F2: C60.1 IC5.3 R130.1
V_IREF_SWD_F3: C83.1 IC7.3 R180.1
V_ISENSE: Q1.E R28.1 R31.2 R40.1 R41.1 R42.1 R43.1 R44.1 R45.1 R46.1 R47.1 R48.1 R49.1
V_ISENSE1: Q4.E R53.2 R58.1 R65.1 R91.1 R92.1 R93.1 R94.1 R95.1 R96.1 R97.1 R98.1 R99.1
V_ISENSE2: Q7.E R103.2 R108.1 R115.1 R141.1 R142.1 R143.1 R144.1 R145.1 R146.1 R147.1 R148.1 R149.1
V_ISENSE3: Q10.E R153.2 R158.1 R165.1 R191.1 R192.1 R193.1 R194.1 R195.1 R196.1 R197.1 R198.1 R199.1
VDRV: C21.2 D9.A IC1.1 R25.2 R26.1 R27.2
VDRV1: C32.2 D18.A IC3.1 R64.2 R66.1 R84.2
VDRV2: C55.2 D28.A IC5.1 R114.2 R116.1 R134.2
VDRV3: C78.2 D38.A IC7.1 R164.2 R166.1 R184.2
VDUT_OP: IC2.7 R20.2 R23.1
VDUT_OP1: IC4.7 R86.2 R90.1
VDUT_OP2: IC6.7 R136.2 R140.1
VDUT_OP3: IC8.7 R186.2 R190.1